# Altium PCB Hat_Board_PCB.PcbDoc (part 2 of 2)
Units mm, origin at the board's own origin, x right, y up, seen from the top; angles counter-clockwise.
Board outline 64 x 85 mm, 4 copper layers (Top Side, Ground Plane, Power Plane, Bottom Side), stack 0.844 mm thick; 133 components, 86 nets, 419 pads, 122 vias.
Unrouted connection lines stored in the file: 4.
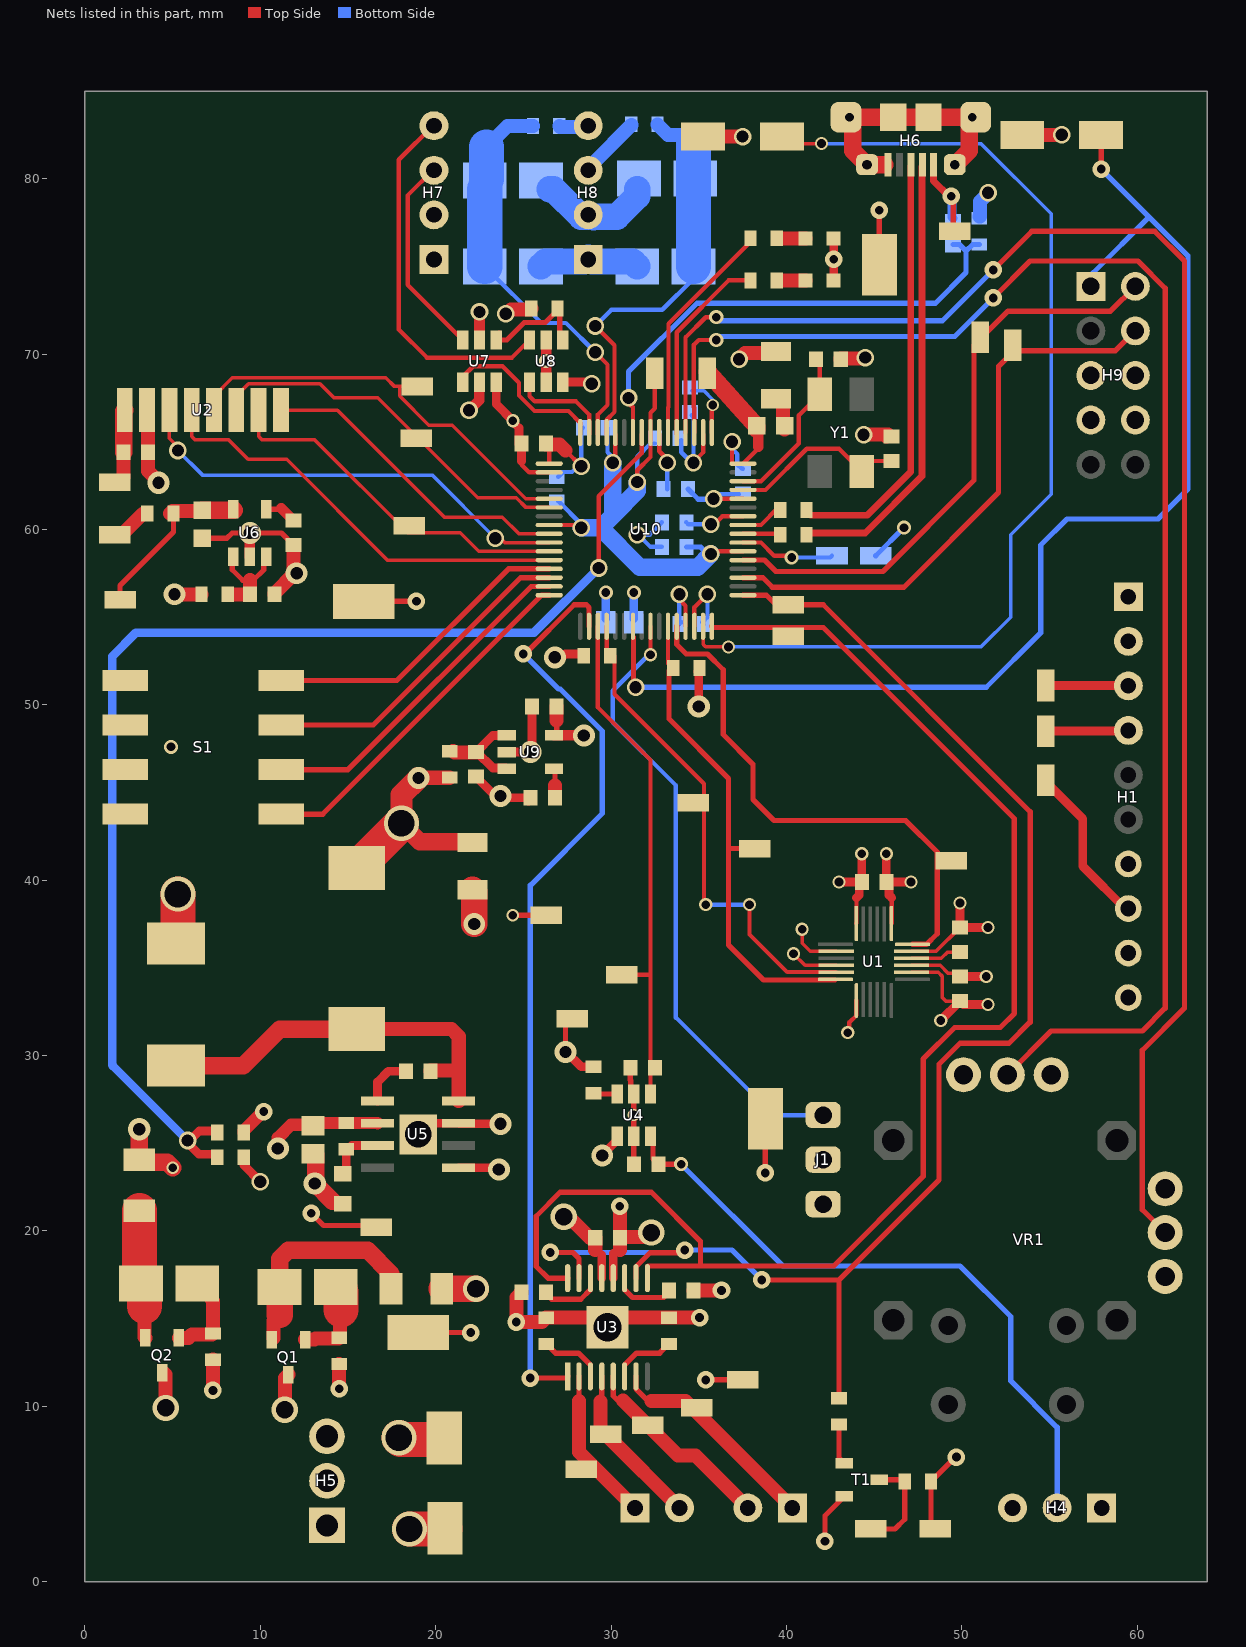
[diagram p4: the nets of this part, all layers, seen from the top]

## Via types
v1: diameter 1, hole 0.7, Top Side to Bottom Side, 32 vias
v2: diameter 1, hole 0.5, Top Side to Bottom Side, 25 vias
v3: diameter 0.75, hole 0.5, Top Side to Bottom Side, 18 vias
v4: diameter 1.25, hole 0.7, Top Side to Bottom Side, 13 vias
v5: diameter 0.8, hole 0.5, Top Side to Bottom Side, 9 vias
v6: diameter 1.5, hole 1, Top Side to Bottom Side, 5 vias
v7: diameter 2, hole 1.5, Top Side to Bottom Side, 5 vias
v8: diameter 0.7, hole 0.5, Top Side to Bottom Side, 4 vias
v9: diameter 2.3, hole 2.1, Top Side to Bottom Side, 4 vias
v10: diameter 1.27, hole 0.7, Top Side to Bottom Side, 3 vias
v11: diameter 1.27, hole 0.711, Top Side to Bottom Side, 2 vias
v12: diameter 2.2, hole 1.6, Top Side to Bottom Side, 1 vias
v13: diameter 1.3, hole 1.1, Top Side to Bottom Side, 1 vias

## Nets (pads, with @x,y where several pads share a name; then routed paths per layer and width w, separated by ;. In a path a pad name is that pad's centre, name@x,y a point inside that pad or via, vN(x,y) a via of type N, cw(c..) or ccw(c..) an arc to the next point about the centre after c; other vN are vias at no path point)
3V3: C1.2 C2.2 C19.2 C22.2 C24.2 C26.2 C27.2 C29.2 C31.2 D4.1 D5.1 DL1.2 DL2.2 H1.1 H1.9 H8.1 H9.7 H9.8 J1.2 R4.2 R6.2 R22.2 R23.2 TP4.1 TP6.1 TP20.1 U1.1 U1.8 U1.13 U1.22 U7.6 U8.6 U9.5 U10.1 U10.7 U10.18 U10.45 U10.58 VR1.1 VR1.4 | length 68.2
  Top Side w0.2: v3(40.4,35.8) 41.065,35.135 U1.22@42.843,35.135 ; U1.8@47.143,34.735 48.665,34.735 48.9,34.5 48.9,33.3 49.1,33.1 C2.2@49.9,33.1
  Top Side w0.25: 24.9,63.9 24.9,63.69 25.34,63.25 U10.18@26.475,63.25 ; U10.7@32.75,65.425 32.75,64.453 33.2,64.003 v1(33.2,63.8) ; v1(33.9,56.3) 33.9,55.997 34.25,55.647 U10.45@34.25,54.475 ; U10.1@35.75,65.525 35.75,67.05 v8(35.8,67.1) ; v1@35.903,60.3 36.353,60.75 U10.58@37.525,60.75 ; v3(43.5,31.3) 43.596,31.396 43.596,31.888 43.993,32.285 U1.1@43.993,33.135 ; U1.13@45.993,37.535 46,37.542 46,39
  Top Side w0.3: U9.5@26.75,48.25 26.9,48.4 26.9,49.1 ; v4(27.4,30.2) 27.4,31.75 27.75,32.1 TP20.1@27.8,32.1 TP20.1@28.1,32.4 ; TP4.1@48.5,3 48.25,3.25 R4.2@48.25,5.7 v2@49.65,7.1
  Top Side w0.5: U7.6@23.45,68.4 23.45,67.15 v3(24.4,66.2) 24.4,66.132 24.75,65.782 24.75,64.85 24.9,64.7 24.9,63.9 ; v11(26.8,52.7) 27.208,52.7 27.408,52.9 28.05,52.9 ; U8.6@27.25,68.4 28.5,68.4 28.504,68.396 28.669,68.396 28.75,68.315 v1@28.75,68.15 ; v4(27.4,30.2) 27.45,30.2 28.3,29.35 R6.2@29,29.35 ; R23.2@34.95,51.9 35,51.95 v11(35,49.9) ; DL1.2@42.7,74.2 42.7,75.5 DL2.2@42.7,76.6 ; v3(45.7,41.5) C1.2@45.7,39.9 ; 46,39 45.85,39.15 45.85,39.75 C1.2@45.7,39.9 ; v3(47.1,39.9) C1.2@45.7,39.9 ; v3(48.8,32) C2.2@49.9,33.1 50.1,32.9 v3(51.5,32.9)
  Top Side w0.6: U9.5@26.75,48.25 v4(28.45,48.25)
  Top Side w0.8: 26.9,49.1 C19.2@26.9,49.9
  Bottom Side w0.2: C31.2@34.6,67.9 35.3,67.9 35.8,67.4 v8(35.8,67.1)
  Bottom Side w0.25: C22.2@33.2,62.3 v1(33.2,63.8) ; C27.2@33.9,54.6 34,54.7 33.9,54.8 v1(33.9,56.3) ; C29.2@34.3,60.4 34.4,60.3 v1(35.7,60.3)
  Bottom Side w0.3: TP6.1@45.1,58.5 v5(46.7,60.1)
  Bottom Side w0.5: C26.2@31.3,54.9 v5(31.3,56.4)
  Bottom Side w1.5: D4.1@26,75 26.275,75.275 28.475,75.275 28.7,75.5 28.925,75.275 31.225,75.275 D5.1@31.5,75
  other v1: 28.9,68.3
  other v2: 49.7,7.1 42.7,75.4
"3V3 Breakout 1": D4.2 D6.1 R19.1 U10.14 | length 22.9
  Top Side w0.25: v1(29.1,70.1) 29.8,69.4 29.8,67.1 29.25,66.55 U10.14@29.25,65.525 U10.14@29.25,65.425
  Bottom Side w0.25: D4.2@22.8,75 26.028,71.772 27.428,71.772 v1(29.1,70.1)
  Bottom Side w0.8: 22.9,81.8 24.1,83 R19.1@25.55,83
  Bottom Side w2: D4.2@22.8,75 22.8,75.2 D6.1@22.8,79.4 ; D6.1@22.9,79.975 22.9,81.8
"3V3 Breakout 2": D5.2 D7.1 R18.1 U10.13 | length 22.3
  Top Side w0.25: v1(29.1,71.6) 30.2,70.5 30.2,66.7 29.75,66.25 U10.13@29.75,65.525 U10.13@29.75,65.425
  Bottom Side w0.25: v1(29.1,71.6) 30.021,72.521 32.921,72.521 D5.2@34.7,74.3
  Bottom Side w0.8: R18.1@32.65,83.1 33.25,82.5 34.2,82.5
  Bottom Side w2: D5.2@34.7,75 34.7,82
"3V3 Radio": C16.2 R1.1 TP16.1 U6.5 | length 10
  Top Side w0.3: TP16.1@2,56 2,56.8 5.05,59.85 R1.1@5.05,60.9
  Top Side w0.8: R1.1@4.85,60.9 4.9,60.95 5,61.05 6.65,61.05 C16.2@6.7,61.1
  Top Side w1: C16.2@6.7,61.1 8.5,61.1 U6.5@8.45,61.15
5V: C12.2 H4.1 H7.1 L2.2 R13.1 R16.2 R17.1 TP18.1 U4.1 U5.5 | length 21.7
  Top Side w0.3: v8(24.4,38) TP18.1@26.3,38
  Top Side w0.5: U5.5@21.311,23.595 23.505,23.595 v4(23.6,23.5) ; v4(29.5,24.3) 29.5,24.325 30.35,25.175 U4.1@30.35,25.4
  Top Side w0.8: v4(5.1,56.3) R13.1@6.65,56.3 ; v4(19.025,45.825) 19.038,45.838 20.787,45.838 R17.1@20.8,45.85 ; v1(24,72.3) 24.054,72.3 24.304,72.55 25.4,72.55 R16.2@25.45,72.6
  Top Side w1: v7(18.044,43.244) 19.087,42.2 22.05,42.2 C12.2@22.1,42.15
  Top Side w1.25: v7(18.044,43.244) 18.044,44.844 v4(19.025,45.825)
  Top Side w2: L2.2@15.5,40.7 v7(18.044,43.244)
"5V Breakout 1": U7.4 U10.16 | length 9.7
  Top Side w0.25: U7.4@21.55,68.4 21.55,68.714 22.136,69.3 23.814,69.3 24.75,68.364 24.75,67.634 25.634,66.75 27.575,66.75 28.25,66.075 U10.16@28.25,65.425
"5V Breakout 2": U8.4 U10.15 | length 5.8
  Top Side w0.25: U8.4@25.35,68.4 25.35,67.6 25.65,67.3 28,67.3 28.75,66.55 U10.15@28.75,65.525 U10.15@28.75,65.425
D_N: H6.2 R21.1 | length 25.4
  Top Side w0.381: R21.1@41.35,59.8 44.498,59.8 47.735,63.037 47.735,80.695 H6.2@47.741,80.7
D_P: H6.3 R20.1 | length 24.4
  Top Side w0.381: R20.1@41.2,61 41.4,60.8 44.6,60.8 47.1,63.3 H6.3@47.1,80.7
Freq1: S1.8 U10.29 | length 17.9
  Top Side w0.3: S1.8@11.2,51.38 17.78,51.38 24.15,57.75 U10.29@26.475,57.75
Freq2: S1.7 U10.30 | length 18.8
  Top Side w0.3: S1.7@11.2,48.84 16.44,48.84 24.85,57.25 U10.30@26.475,57.25
Freq3: S1.6 U10.31 | length 19.6
  Top Side w0.3: S1.6@11.2,46.3 15,46.3 25.45,56.75 U10.31@26.475,56.75
Freq4: S1.5 U10.32 | length 20.5
  Top Side w0.3: S1.5@11.19,43.76 13.56,43.76 26.05,56.25 U10.32@26.475,56.25
GND: C1.1 C2.1 C3.1 C5.1 C6.2 C7.1 C8.1 C9.1 C10.1 C12.1 C13.1 C14.1 C15.1 C16.1 C17.1 C18.1 C19.1 C20.1 C21.1 C22.1 C23.2 C24.1 C25.2 C26.1 C27.1 C28.2 C29.1 C30.2 C31.1 C33.1 D2.1 D6.2 D7.2 H1.2 H1.7 H1.10 H4.3 H5.1 H5.3 H6.5 H6.6 H7.2 H8.2 H9.5 H9.6 J1.3 R2.2 R3.2 R7.1 R8.1 R10.1 R14.1 R15.1 R24.1 S1.1 S1.2 S1.3 S1.4 S2.2 S3.2 T1.2 TP8.1 TP9.1 TP10.1 TP11.1 U1.9 U1.11 U1.18 U1.20 U2.2 U3.13 U3.17 U4.2 U4.5 U5.7 U5.EPAD U6.2 U7.2 U7.5 U8.2 U8.5 U9.2 U10.2 U10.17 U10.46 U10.60 VR1.3 VR1.6 | length 165
  Top Side w0.2: v3(40.9,37.2) 40.905,37.195 40.905,36.395 41.365,35.935 U1.20@42.843,35.935 ; U1.9@47.143,35.135 48.765,35.135 49.2,34.7 C2.1@49.9,34.7 ; U1.11@47.143,35.935 48.535,35.935 C3.1@49.9,37.3
  Top Side w0.25: U10.17@26.475,63.75 26.475,64.425 ; 27.4,64.5 v1(28.3,63.6) ; v1(34.7,63.8) 34.7,63.84 35.25,64.39 U10.2@35.25,65.425 ; U10.46@34.75,54.475 34.75,55.55 v1(35.5,56.3) ; v1(35.85,61.75) U10.60@37.525,61.75 ; U1.18@43.993,37.535 44,37.542 44,39
  Top Side w0.3: C16.1@6.7,59.5 8.1,59.5 8.4,59.8 v4(9.4,59.8) 11.2,59.8 C15.1@11.9,59.1 ; TP9.1@15.9,55.9 v2(18.9,55.9) ; TP8.1@19,14.2 v2(22,14.2) ; 29.1,18.9 29.475,18.625 ; C8.1@31.1,29.3 31.1,28.6 31.125,28.575 31.125,27.975 U4.5@31.3,27.8 v8(31.3,26.6) U4.2@31.3,25.4 C9.1@31.3,23.8 ; v2(38.8,23.3) TP11.1@38.8,26.4 ; v2(42.2,2.3) 42.2,3.75 T1.2@43.3,4.85 ; TP10.1@45.3,75.1 v2(45.3,78.2)
  Top Side w0.5: R15.1@9.05,24.2 9.05,23.75 v1(10,22.8) ; v7(19,25.5) 19.635,26.135 U5.7@21.311,26.135 21.346,26.1 v4(23.7,26.1) ; C17.1@22.3,45.9 23.5,44.7 C18.1@25.4,44.7 ; U9.2@24.05,47.3 v4(25.4,47.3) 25.5,47.4 C19.1@25.5,49.9 ; U3.13@29.475,17.3 29.475,18.625 ; v3(43,39.9) C1.1@44.3,39.9 ; 44,39 44.15,39.15 44.15,39.75 C1.1@44.3,39.9 ; v3(44.3,41.5) C1.1@44.3,39.9 ; C2.1@49.9,34.5 v3(51.4,34.5) ; v3(49.9,38.7) C3.1@49.9,37.3 v3(51.5,37.3)
  Top Side w0.6: U6.2@9.4,58.45 v4(9.4,59.8) ; v1(21.9,66.8) 22.475,67.375 22.475,68.375 U7.5@22.5,68.4 ; U7.2@22.5,70.8 v1(22.5,72.4) ; U8.5@26.3,68.4 v5(26.3,69.6) U8.2@26.3,70.8
  Top Side w0.8: U2.2@3.543,66.8 3.593,66.75 3.593,65.107 3.6,65.1 C5.1@3.6,64.4 3.6,63.327 4.2,62.727 v10(4.2,62.664) ; v2(7.3,10.9) R8.1@7.3,12.65 ; C14.1@10.8,56.3 10.8,56.35 11.95,57.5 v4(12.075,57.5) ; v4@11.9,57.75 C15.1@11.9,59.1 ; v2(14.5,11) R7.1@14.5,12.4 ; C6.2@24.9,16.45 C6.2@24.9,16.5 24.6,16.2 v2(24.6,14.8) 26.05,14.8 R2.2@26.3,15.05 29.25,15.05 v12(29.8,14.5) 30.35,15.05 R3.2@33.3,15.05 v2(35.05,15.05) ; C24.1@26.3,64.9 26.3,64.85 27.05,64.85 27.4,64.5 ; v6(27.3,20.8) 27.6,20.8 28.8,19.6 C7.1@29.1,19.6 29.1,18.9 ; S3.2@35.25,82.4 v1(37.5,82.4) ; v1(37.3,69.7) 37.65,70.05 R24.1@39.4,70.05 ; C20.1@43.1,69.7 43.1,69.75 44.396,69.75 44.446,69.8 v1(44.5,69.8) ; v1(44.4,65.4) C21.1@45.7,65.4 ; C21.1@45.7,65.3 45.65,65.35 C21.1@45.7,65.4 ; C21.1@45.8,65.4 C21.1@45.7,65.4 ; S2.2@53.45,82.5 v1(55.7,82.5)
  Top Side w1: C10.1@13.15,24.35 13.15,22.75 v10(13.1,22.7) 14.1,21.7 ; 45.6,80.8 H6.6@44.6,80.8 44.575,80.8 43.775,81.6 43.775,83.325 H6.6@43.6,83.5 H6.6@46.1,83.5 H6.6@48.1,83.5 H6.6@50.6,83.5 50.425,83.325 50.425,81.6 49.625,80.8 H6.6@49.6,80.8
  Top Side w1.5: C12.1@22.1,39.45 22.2,39.35 v4(22.2,37.5)
  Top Side w2: D2.1@4.75,36.375 D2.1@5.2,36.375 5.3,36.475 v7(5.3,39.2) ; v7(18.5,3) 20.522,3 C13.1@20.522,3.039
  Bottom Side w0.25: C28.2@27,63 27.275,63.275 27.772,63.275 28.097,63.6 v1(28.3,63.6) 28.3,65.6 28.25,65.65 C25.2@28.4,65.8 ; v1(31.5,59.7) v1@31.55,59.7 ; C30.2@32.9,59 32.25,59 v1@31.55,59.7 ; C29.1@32.9,60.4 32.2,59.7 v1@31.55,59.7 ; C23.2@34,65.1 34,64.4 v1@34.6,63.8 ; C31.1@34.6,66.5 34.7,66.4 v1(34.7,63.8) ; C27.1@35.3,54.6 35.2,54.7 35.5,55 v1(35.5,56.3) ; v1(35.85,61.75) 36.1,62 C33.1@37.3,62
  Bottom Side w0.3: C22.1@34.4,62.3 34.977,61.723 35.823,61.723 v1(35.85,61.75)
  Bottom Side w0.5: C26.1@29.7,54.9 v5(29.7,56.4)
  Bottom Side w0.8: R14.1@51,77.85 51.05,77.85 51.05,78.696 51.5,79.146 v1(51.5,79.2)
  Bottom Side w1.5: D6.2@26.5,79.4 26.725,79.4 28.296,77.829 28.971,77.829 29,77.8 29.029,77.829 30.329,77.829 31.5,79 D7.2@31.5,79.4
  other v4: 23.7,44.8
  other v5: 4.9,47.6
"IMU I2C CLK": R22.1 TP32.1 U1.23 U10.36 | length 28.1
  Top Side w0.25: U10.36@29.75,54.475 29.75,53 R22.1@29.95,52.8 ; R22.1@30.2,52.8 30.2,50.6 35.3,45.5 35.3,38.7 v3(35.4,38.6) ; v3(37.9,38.6) 37.9,36.9 40.04,34.76 U1.23@42.818,34.76
  Bottom Side w0.25: v3(35.4,38.6) v3(37.9,38.6)
"IMU I2C DATA": R23.1 TP27.1 U1.24 U10.43 | length 27.7
  Top Side w0.25: R23.1@33.25,52.35 U10.43@33.25,54.475
  Top Side w0.3: R23.1@33.45,52.1 33.3,51.95 33.3,49.2 36.7,45.8 36.7,41.8 ; TP27.1@38.1,41.8 36.7,41.8 ; U1.24@42.758,34.3 38.7,34.3 36.7,36.3 36.7,41.8
"IMU INT": TP28.1 U1.12 U10.44 | length 30.4
  Top Side w0.3: U10.44@33.75,54.475 33.75,53.44 34.29,52.9 35.5,52.9 36.4,52 36.4,48.3 38.1,46.6 38.1,44.6 39.3,43.4 46.8,43.4 48.6,41.6 48.6,36.942 47.993,36.335 U1.12@47.193,36.335
IMU/Joystick: J1.1 U10.41 | length 35.7
  Top Side w0.25: v3(32.25,52.85) U10.41@32.25,54.475
  Bottom Side w0.25: v3@32.35,53.05 32.25,52.95 v3(32.25,52.85) 32.154,52.85 30.1,50.796 30.1,49 33.7,45.4 33.7,32.16 39.26,26.6 J1.1@42.1,26.6
"Joystick X axis": U10.4 VR1.5 | length 94.2
  Top Side w0.25: U10.4@34.25,65.525 34.25,70.95 35.4,72.1 v5(36,72.1)
  Top Side w0.3: v2(51.8,74.8) 54,77 61,77 62.7,75.3 62.7,32.7 60.3,30.3 60.3,21.2 VR1.5@61.6,19.9
  Bottom Side w0.3: v5(36,72.1) 36.2,71.9 48.9,71.9 v2(51.8,74.8)
"Joystick Y axis": U10.3 VR1.2 | length 86.1
  Top Side w0.25: U10.3@34.75,65.525 34.75,66.95 34.725,66.975 34.725,70.525 35,70.8 v5(36,70.8)
  Top Side w0.3: v2(51.8,73.2) 53.9,75.3 60.051,75.3 61.6,73.751 61.6,32.7 60.3,31.4 55.1,31.4 VR1.2@52.6,28.9
  Bottom Side w0.3: v5(36,70.8) 36.2,71 49.6,71 v2(51.8,73.2)
"LED Signal": C8.2 TP24.1 U4.4 U10.35 | length 29.6
  Top Side w0.25: U10.35@29.25,54.475 29.25,49.85 32.25,46.85 32.25,34.6 ; TP24.1@30.6,34.6 32.25,34.6 ; U4.4@32.25,27.8 32.25,34.6
NetC3_2: C3.2 U1.10 | length 2.9
  Top Side w0.2: U1.10@47.143,35.535 48.835,35.535 49.2,35.9 C3.2@49.9,35.9
NetC4_1: C4.1 U3.11 | length 3.5
  Top Side w0.3: U3.11@30.775,17.3 30.775,16.65 31.225,16.2 33,16.2 C4.1@33.3,16.5
NetC5_2: C5.2 L1.1 U2.1 | length 4
  Top Side w0.8: L1.1@2.1,62.9 2.2,63 C5.2@2.2,64.4
  Top Side w1: C5.2@2.2,64.4 2.221,64.421 2.221,66.75 U2.1@2.271,66.8
NetC6_1: C6.1 U3.14 | length 3.1
  Top Side w0.3: C6.1@26.6,16.1 28.275,16.1 28.825,16.65 U3.14@28.825,17.3
NetC9_2: C9.2 H4.2 U4.3 | length 37.5
  Top Side w0.3: U4.3@32.25,25.4 32.4,25.25 32.4,24.1 C9.2@32.7,23.8 v5(34,23.8)
  Bottom Side w0.3: v5(34,23.8) 39.8,18 49.9,18 52.8,15.1 52.8,11.432 55.44,8.792 H4.2@55.44,4.2
NetC11_1: C11.1 U5.1 | length 2.9
  Top Side w0.5: U5.1@16.689,27.405 16.689,28.489 17.3,29.1 C11.1@18.3,29.1
NetC11_2: C11.2 D2.2 L2.1 U5.8 | length 22.5
  Top Side w0.8: L2.1@15.5,31.5 20.9,31.5 21.316,31.084 21.316,29.242 ; C11.2@19.7,29.1 19.7,29.15 21.225,29.15 21.316,29.242 ; U5.8@21.311,27.405 21.316,27.4 21.316,29.242
  Top Side w1: D2.2@5.2,29.425 9.025,29.425 11.1,31.5 L2.1@15.5,31.5
NetC13_2: C13.2 H5.2 Q1.3 Q2.3 | length 6.8
  Top Side w0.8: Q2.3@4.5,11.9 4.6,11.8 v6(4.6,9.9) ; v6(11.4,9.8) 11.4,11.6 Q1.3@11.6,11.8
  Top Side w2: v7(17.9,8.2) 18,8.1 20.489,8.1 C13.2@20.489,8.184
NetC14_2: C14.2 R13.2 U6.1 U6.3 | length 5.8
  Top Side w0.3: U6.1@8.45,58.45 8.4,58.4 8.4,57.7 9,57.1 9.4,57.1 9.6,57.1 10.2,57.7 10.2,58.3 U6.3@10.35,58.45
  Top Side w0.8: R13.2@8.3,56.3 C14.2@9.4,56.3 9.4,57.1
NetC15_2: C15.2 U6.4 | length 2.1
  Top Side w0.3: U6.4@10.35,61.15 11.25,61.15 11.35,61.15 11.4,61.2
  Top Side w0.6: 11.2,61.2 11.25,61.15 C15.2@11.9,60.5
NetC17_2: C17.2 R17.2 U9.1 U9.3 | length 5.6
  Top Side w0.5: C17.2@22.3,47.3 C17.2@22.312,47.3 ; U9.3@24.05,46.35 24,46.4 23.25,46.4 22.35,47.3 C17.2@22.312,47.3 ; U9.1@24.05,48.25 23.25,48.25 C17.2@22.312,47.3
  Top Side w0.8: R17.2@21,47.35 21.063,47.288 C17.2@22.3,47.288
NetC18_2: C18.2 U9.4 | length 1.5
  Top Side w0.3: U9.4@26.75,46.35 26.8,46.3 26.8,45.6
  Top Side w0.8: C18.2@26.8,44.7 26.8,45.4
NetC20_2: C20.2 U10.62 Y1.3 | length 9.2
  Top Side w0.25: 38.552,62.752 40.7,64.9 40.7,66.5 Y1.3@41.9,67.7 41.9,69.3 C20.2@41.7,69.5
  Top Side w0.254: U10.62@37.525,62.75 37.527,62.752 38.552,62.752
NetC21_2: C21.2 U10.61 Y1.1 | length 9.9
  Top Side w0.25: U10.61@37.525,62.25 38.811,62.25 41.161,64.6 43,64.6 Y1.1@44.3,63.3 44.9,63.9 C21.2@45.7,63.9
NetC23_1: C23.1 C25.1 C28.1 C30.1 L3.2 U10.8 U10.12 U10.24 U10.54 | length 35.2
  Top Side w0.25: U10.24@26.475,60.25 v1@28.15,60.25 ; v1(30.1,63.8) 30.25,63.95 U10.12@30.25,65.425 ; v1(31.5,62.7) 31.5,63.38 32.25,64.13 U10.8@32.25,65.525 32.25,66.65 32.5,66.9 L3.2@32.5,68.7 ; v1(35.7,58.6) 35.85,58.75 U10.54@37.525,58.75
  Bottom Side w0.25: C28.1@27,61.6 28.3,60.3 v1(28.3,60.1) ; C25.1@29.8,65.8 29.8,64.4 30.1,64.1 v1(30.1,63.8) ; v1(31.5,62.7) 31.5,64.15 32.25,64.9 C23.1@32.5,64.9
  Bottom Side w0.3: C30.1@34.3,59 35.111,59 35.511,58.6 v1(35.7,58.6)
  Bottom Side w1: v1(28.3,60.1) 29.4,60.1 ; v1(30.1,63.8) 30.1,61 30.2,60.9 ; v1(31.5,62.7) 31.5,62.2 30.2,60.9 ; v1(35.7,58.6) 34.95,57.85 31.65,57.85 29.4,60.1 ; 29.4,60.1 30.2,60.9
NetC32_1: C32.1 R24.2 | length 2
  Top Side w0.8: R24.2@39.4,67.35 39.65,67.35 39.8,67.2 39.8,65.8 C32.1@39.9,65.7
NetC32_2: C32.2 C33.2 L3.1 U10.64 | length 9.5
  Top Side w0.254: v1(36.9,65) 36.9,63.803 U10.64@36.951,63.752 ; U10.64@37.525,63.75 38.437,64.662
  Top Side w0.6: 38.4,64.7 38.4,65.4
  Top Side w1: L3.1@35.5,69 35.55,68.945 38.309,65.864 C32.2@38.3,65.7
  Bottom Side w0.254: v1(36.9,65) 36.9,64.598 37.202,64.296 37.202,63.723 37.475,63.45 C33.2@37.525,63.45
NetD1_1: D1.1 F1.1 Q1.2 | length 12.6
  Top Side w0.8: Q1.2@10.75,13.9 10.75,14.85 11.1,15.2
  Top Side w1: D1.1@11.1,16.8 11.1,18.4 11.58,18.88 16.12,18.88 17.45,17.55 F1.1@17.45,16.7
  Top Side w1.5: 11.1,15.2 D1.1@11.1,16.8
NetD1_2: D1.2 Q1.1 R7.2 | length 4.4
  Top Side w0.8: Q1.1@12.55,13.8 13.1,13.8 13.15,13.85 14.45,13.85 R7.2@14.5,13.9 14.55,13.95 14.55,14.75
  Top Side w2: D1.2@14.3,16.8 14.525,16.8 14.55,16.775 14.55,16.55 14.6,16.5 14.6,15.5
NetD3_1: D3.1 F2.1 Q2.2 | length 6.7
  Top Side w0.8: 3.4,14.9 3.4,13.95 Q2.2@3.45,13.9
  Top Side w2: F2.1@3.1,21.15 3.1,16.925 3.125,16.9 3.2,16.9 3.375,16.9 3.4,16.875 3.4,15.7
NetD3_2: D3.2 Q2.1 R8.2 | length 5.3
  Top Side w0.8: Q2.1@5.35,13.9 5.9,13.9 6.1,14.1 7.25,14.1 R8.2@7.3,14.15 7.3,16 7.25,16.05 7.25,16.275 6.625,16.9 D3.2@6.4,16.9
NetDL1_1: DL1.1 R25.1 | length 1.5
  Top Side w0.8: R25.1@39.65,74.2 DL1.1@41.1,74.2
NetDL2_1: DL2.1 R26.1 | length 1.5
  Top Side w0.8: R26.1@39.65,76.6 DL2.1@41.1,76.6
NetH1_3: H1.3 TP3.1 | length 4.7
  Top Side w0.5: TP3.1@54.8,51.1 59.48,51.1 H1.3@59.5,51.08
NetH1_4: H1.4 TP2.1 | length 4.7
  Top Side w0.5: TP2.1@54.8,48.5 59.46,48.5 H1.4@59.5,48.54
NetH1_8: H1.8 TP1.1 | length 9.5
  Top Side w0.5: TP1.1@54.7,45.7 56.9,43.5 56.9,40.8 59.4,38.3 59.42,38.3 H1.8@59.5,38.38
NetH7_3: H7.3 U7.3 | length 11.7
  Top Side w0.25: H7.3@19.9,80.54 18.4,79.04 18.4,73.95 U7.3@21.55,70.8
NetH7_4: H7.4 U8.3 | length 21
  Top Side w0.25: H7.4@19.9,83.08 17.9,81.08 17.9,71.4 19.5,69.8 24.35,69.8 U8.3@25.35,70.8
NetH8_3: H8.3 R18.2 | length 3.6
  Bottom Side w0.8: H8.3@29,80.34 29,80.9 R18.2@31.175,83.075
NetH8_4: H8.4 R19.2 | length 2
  Bottom Side w0.8: R19.2@27.05,83 27.1,82.95 28.93,82.95 H8.4@29,82.88
NetL1_2: L1.2 R1.2 | length 2.3
  Top Side w0.8: L1.2@1.8,59.8 L1.2@1.7,59.7 2.1,59.7 3.25,60.85 3.3,60.85 R1.2@3.35,60.9
NetR2_1: R2.1 U3.3 | length 3.7
  Top Side w0.3: R2.1@26.3,13.55 26.827,13.023 28.152,13.023 28.825,12.35 U3.3@28.825,11.7
NetR3_1: R3.1 U3.6 | length 3.7
  Top Side w0.3: U3.6@30.775,11.7 30.775,12.35 31.448,13.023 32.773,13.023 R3.1@33.3,13.55
NetR4_1: R4.1 T1.3 TP5.1 | length 5.8
  Top Side w0.3: TP5.1@44.8,3 46.2,3 46.75,3.55 R4.1@46.75,5.7 46.65,5.8 T1.3@45.3,5.8
NetR5_2: R5.2 T1.1 | length 2.3
  Top Side w0.3: R5.2@43,8.95 43,7.05 T1.1@43.3,6.75
NetR6_1: R6.1 U4.6 | length 1.4
  Top Side w0.3: R6.1@29,27.85 29.05,27.8 U4.6@30.35,27.8
NetR9_1: R9.1 R10.2 U5.3 | length 3.1
  Top Side w0.5: R10.2@14.9,23.45 R9.1@14.9,24.65 15,24.65 15.211,24.861 16.685,24.861 U5.3@16.689,24.865
NetR16_1: R16.1 U7.1 U8.1 | length 6.8
  Top Side w0.3: U7.1@23.625,71.2 23.45,71.025 U7.1@23.45,70.8 24.051,70.8 25.051,71.8 26.25,71.8 26.85,72.4 26.95,72.4 R16.1@26.95,72.6 27.075,72.475 27.075,70.975 U8.1@27.25,70.8
NetR20_2: R20.2 U10.57 | length 2.5
  Top Side w0.25: U10.57@37.525,60.25 38.55,60.25 39.5,61.2 R20.2@39.65,61.2
NetR21_2: R21.2 U10.56 | length 1.8
  Top Side w0.25: U10.56@37.525,59.75 R21.2@39.3,59.75
NetTP7_1: TP7.1 U10.55 | length 5.5
  Top Side w0.25: U10.55@37.525,59.25 38.55,59.25 39.3,58.5 40.2,58.5 v5(40.3,58.4)
  Bottom Side w0.25: v5(40.3,58.4) 42.5,58.4 TP7.1@42.6,58.5
nRST: H9.1 S2.1 U10.39 | length 69
  Top Side w0.3: U10.39@31.275,53.85 31.275,51.125 v1(31.4,51) ; v2(57.95,80.55) S2.1@57.95,82.5 S2.1@58.1,82.65
  Bottom Side w0.3: v1(31.4,51) 51.4,51 54.5,54.1 54.5,59.1 56,60.6 61.2,60.6 62.9,62.3 62.9,75.6 60.68,77.82 ; H9.1@57.5,74.64 60.68,77.82 ; v2(57.95,80.55) 60.68,77.82
"Piezo 11": H2.1 TP15.1 U3.2 | length 8.8
  Top Side w0.3: 28.175,10.3 U3.2@28.175,11.7
  Top Side w0.8: 28.175,10.3 28.175,7.385 H2.1@31.36,4.2
"Piezo 12": H2.2 TP14.1 U3.4 | length 9.3
  Top Side w0.3: 29.288,10.388 29.475,10.575 U3.4@29.475,11.7
  Top Side w0.8: 29.4,10.275 29.4,8.7 29.9,8.2 H2.2@33.9,4.2
"Piezo 21": H3.1 TP13.1 U3.7 | length 12.2
  Top Side w0.3: U3.7@31.425,11.7 31.425,10.975 32.1,10.3
  Top Side w0.8: 32.3,10.3 34.24,10.3 H3.1@40.34,4.2
"Piezo 22": H3.2 TP12.1 U3.5 | length 11.3
  Top Side w0.3: U3.5@30.125,11.7 30.125,10.575 30.5,10.2
  Top Side w0.8: 30.675,10.325 33.819,7.181 34.819,7.181 H3.2@37.8,4.2
"Piezo High": TP29.1 U3.9 U3.16 U10.48 | length 81.8
  Top Side w0.3: U3.16@27.525,17.3 26.4,17.3 25.734,17.966 25.734,20.834 27.1,22.2 32.3,22.2 35.1,19.4 35.1,18 ; U3.9@32.075,17.3 32.075,17.964 32.111,18 35.1,18 ; U10.48@35.75,54.475 35.825,54.4 42.1,54.4 53,43.5 53,32.4 52.2,31.6 49.6,31.6 47.8,29.8 47.8,23.1 42.7,18 36.9,18 35.1,18
"Piezo Low": R5.1 TP22.1 U3.10 U3.15 U10.49 | length 84.6
  Top Side w0.3: v2(26.534,18.766) 27.834,18.766 28.175,18.425 U3.15@28.175,17.3 ; U3.10@31.425,17.3 31.425,17.95 32.225,18.75 34.05,18.75 v2(34.2,18.9) ; U10.49@37.525,56.25 38.85,56.25 39.4,55.7 TP22.1@39.7,55.7 ; v2(38.6,17.2) 43,17.2 ; TP22.1@40.1,55.7 42.1,55.7 53.9,43.9 53.9,31.9 52.7,30.7 49.9,30.7 48.7,29.5 48.7,22.9 43,17.2 ; R5.1@43,10.45 43,17.2
  Bottom Side w0.3: v2(26.534,18.766) 34.066,18.766 v2(34.2,18.9) 36.9,18.9 v2(38.6,17.2)
"Piezo Sleep": U3.1 U10.34 | length 53
  Top Side w0.3: v2@25.1,52.9 27.9,55.7 28.6,55.7 28.75,55.55 U10.34@28.75,54.475 ; v2(25.4,11.6) 27.425,11.6 U3.1@27.525,11.7
  Bottom Side w0.3: v2(25,52.9) 27,50.9 27.108,50.9 29.5,48.508 29.5,43.8 25.4,39.7 v2(25.4,11.6)
"Radio CE": U2.3 U10.26 | length 25.9
  Top Side w0.2: U2.3@4.814,66.8 4.814,65.202 5.3,64.716 v1(5.3,64.5) ; v1(23.4,59.5) 23.679,59.5 23.929,59.25 U10.26@26.475,59.25
  Bottom Side w0.2: v1(5.3,64.5) 6.7,63.1 19.8,63.1 v1(23.4,59.5)
"Radio CSN": U2.4 U10.28 | length 24.8
  Top Side w0.2: U2.4@6.086,66.8 6.086,65.3 6.286,65.1 8.2,65.1 9.3,64 11.5,64 17.25,58.25 U10.28@26.475,58.25
"Radio IRQ": U2.8 U10.25 | length 18.2
  Top Side w0.2: U2.8@11.171,66.8 14.4,66.8 20.5,60.7 23.8,60.7 24.75,59.75 U10.25@26.475,59.75
"Radio MISO": TP25.1 U2.7 U10.27 | length 20.8
  Top Side w0.2: U2.7@9.9,66.8 9.9,65.3 10.1,65.1 13.1,65.1 18.4,59.8 21.4,59.8 22.45,58.75 U10.27@26.475,58.75
"Radio MOSI": TP26.1 U2.6 U10.22 | length 21.1
  Top Side w0.2: U2.6@8.629,67.6 9.329,68.3 13.4,68.3 14.2,67.5 16.7,67.5 19,65.2 22.4,61.8 24.6,61.8 25.15,61.25 U10.22@26.475,61.25
"Radio SCK": TP31.1 U2.5 U10.21 | length 24.5
  Top Side w0.2: U2.5@7.357,66.8 7.357,67.6 8.407,68.65 17.15,68.65 17.65,68.15 17.95,68.15 ; TP31.1@18.95,68.15 17.95,68.15 ; U10.21@26.475,61.75 25.145,61.75 20.945,65.95 19.609,65.95 17.95,67.609 17.95,68.15
Sleep: S3.1 U10.47 | length 60.5
  Top Side w0.2: U10.47@35.25,54.475 35.25,53.44 35.39,53.3 v3(36.7,53.3) ; S3.1@39.75,82.4 40.15,82 v3(42,82)
  Bottom Side w0.2: v3(36.7,53.3) 51.1,53.3 52.8,55 52.8,59.7 55.1,62 55.1,78 51.1,82 v3(42,82)
STATUS0: R25.2 U10.5 | length 11.4
  Top Side w0.25: U10.5@33.75,65.425 U10.5@33.75,65.525 33.75,71.25 36.7,74.2 R25.2@38.15,74.2
STATUS1: R26.2 U10.6 | length 13.2
  Top Side w0.25: U10.6@33.25,65.425 U10.6@33.25,65.525 33.25,66.95 33.275,66.975 33.275,71.725 R26.2@38.15,76.6
SWCLK: H9.2 TP30.1 U10.53 | length 33.9
  Top Side w0.3: U10.53@37.525,58.25 38.75,58.25 39.4,57.6 45.5,57.6 50.7,62.8 50.7,70.5 52.645,72.445 58.485,72.445 H9.2@59.9,73.86
SWDIO: H9.4 TP23.1 U10.51 | length 32.9
  Top Side w0.3: U10.51@37.525,57.25 38.65,57.25 39.2,56.7 46.7,56.7 52.1,62.1 52.1,69.3 52.995,70.195 58.775,70.195 H9.4@59.9,71.32
USB_Detect: R11.1 R14.2 U10.10 | length 28.3
  Top Side w0.25: v1@31.166,67.066 31.25,66.982 U10.10@31.25,65.525 U10.10@31.25,65.425
  Top Side w0.3: v1(31,67.5) 31,67.232 v1@31.166,67.066
  Bottom Side w0.3: v1(31,67.5) 31,69 34.9,72.9 48.5,72.9 50.25,74.65 50.25,75.875 ; R11.1@49.5,76.25 49.875,76.25 50.25,75.875 ; R14.2@51,76.25 50.625,76.25 50.25,75.875
VBATT: C10.2 F2.2 R9.2 R12.2 TP21.1 U5.2 | length 16.7
  Top Side w0.3: v2(12.9,21) 13.6,20.3 TP21.1@17.1,20.3
  Top Side w0.7: R12.2@9.05,25.6 9.05,25.7 10.15,26.8 v2(10.2,26.8) ; v4(11,24.7) 11,25.3 11.75,26.05 13.15,26.05 13.2,26 13.35,26.15 R9.2@14.9,26.15 16.674,26.15 U5.2@16.689,26.135
  Top Side w1: v10(3.1,25.8) F2.2@3.1,24.05 3.25,23.9 4.7,23.9 v8(5,23.6)
"VBATT Detection": R12.1 R15.2 U10.9 | length 72
  Top Side w0.25: v1(29.3,57.8) 29.3,61.9 31.75,64.35 U10.9@31.75,65.425
  Top Side w0.5: R15.2@7.55,24.2 7.55,24.265 7.45,24.365 6.5,24.365 5.85,25.015 v1(5.85,25.15) 5.985,25.15 6.535,25.7 7.45,25.7 R12.1@7.55,25.6
  Bottom Side w0.5: v1(5.85,25.15) 1.6,29.4 1.55,29.45 1.55,52.75 2.9,54.1 25.6,54.1 v1(29.3,57.8)
VBUS: H6.1 R11.2 TP19.1 | length 5.5
  Top Side w0.3: v2@49.275,79 49.523,78.752 TP19.1@49.523,77.077
  Top Side w0.4: H6.1@48.4,80.8 48.4,79.875 v2@49.275,79
  Bottom Side w0.5: v2@49.45,79 49.45,77.8 R11.2@49.5,77.75
  other v2: 49.4,79
VPIEZO: C4.2 C7.2 F1.2 TP17.1 U3.12 | length 11.7
  Top Side w0.3: 30.125,18.725 30.3,18.9 ; v2(35.4,11.5) TP17.1@37.5,11.5
  Top Side w0.5: U3.12@30.125,17.3 30.125,18.725
  Top Side w0.8: 30.5,18.9 v2(30.5,21.4) ; C7.2@30.5,19.65 31.861,19.65 32.111,19.9 v6(32.3,19.9) ; C4.2@34.7,16.6 v2(36.3,16.6)
  Top Side w1.5: F1.2@20.35,16.7 v6(22.3,16.7)
pads on no net: H1.5 H1.6 H6.4 H9.3 H9.9 H9.10 U1.2 U1.3 U1.4 U1.5 U1.6 U1.7 U1.14 U1.15 U1.16 U1.17 U1.19 U1.21 U3.8 U5.4 U5.6 U10.11 U10.19 U10.20 U10.23 U10.33 U10.37 U10.38 U10.40 U10.42 U10.50 U10.52 U10.59 U10.63 VR1.7 VR1.8 VR1.9 VR1.10 VR1.11 VR1.12 VR1.13 VR1.14 Y1.2 Y1.4
copper on no net: | length 1.7
  Bottom Side w0.254: 12.4,46.8 14.1,46.8
  other v9: 27,2 62,2 15,83 62,83
  other v13: 44.993,35.335

## Polygon pours and split planes (outlines as drawn)
GND on Top Side "Top Side-GND" (solid, remove dead copper, pour order 10): 0,85 0,0 64,0 64,85
GND on Bottom Side "Bottom Side-GND" (solid, remove dead copper, pour order 12): 0,85 0,0 64,0 64,85
GND on Ground Plane (split plane): 63.49,0.51 0.51,0.51 0.51,68.9 17.6,68.9 17.6,84.49 63.49,84.49
NetC13_2 on Power Plane (split plane): 10.158,20.208 10.2,20.18 10.25,20.171 18.771,20.171 18.771,11.9 18.78,11.85 18.808,11.808 21.471,9.146 21.471,0.51 0.51,0.51 0.51,22.371 7.996,22.371
VBATT on Power Plane (split plane): 18.771,27.446 18.771,22.2 18.771,20.429 10.304,20.429 8.351,22.382 8.392,22.408 8.42,22.45 8.429,22.5 8.42,22.55 8.392,22.592 8.35,22.62 8.3,22.629 0.51,22.629 0.51,27.427 0.754,27.671 11.1,27.671 11.15,27.68 11.192,27.708 12.454,28.971 17.246,28.971
5V on Power Plane (split plane): 24.771,71.254 23.308,69.792 23.28,69.75 23.271,69.7 23.271,52.4 23.28,52.35 23.308,52.308 25.371,50.246 25.371,43.4 25.371,32.3 25.371,29.2 25.38,29.15 25.408,29.108 28.008,26.508 28.05,26.48 28.1,26.471 33.646,26.471 41.408,18.708 46.171,13.946 46.171,8.9 46.18,8.85 46.208,8.808 49.508,5.508 49.55,5.48 49.6,5.471 63.49,5.471 63.49,0.51 42.029,0.51 42.029,1.1 42.029,6 42.02,6.05 41.992,6.092 37.429,10.654 37.429,18 37.42,18.05 37.392,18.092 33.192,22.292 33.15,22.32 33.1,22.329 19.029,22.329 19.029,27.5 19.02,27.55 18.992,27.592 17.392,29.192 17.35,29.22 17.3,29.229 12.4,29.229 12.35,29.22 12.308,29.192 11.046,27.929 0.7,27.929 0.65,27.92 0.608,27.892 0.51,27.794 0.51,57.671 2.7,57.671 2.75,57.68 2.792,57.708 2.883,57.8 14.6,57.8 17.6,60.8 17.6,69 17.6,84.49 24.771,84.49
VPIEZO on Power Plane (split plane): 37.171,17.946 37.171,10.6 37.18,10.55 37.208,10.508 41.771,5.946 41.771,1.1 41.771,0.51 21.729,0.51 21.729,9.2 21.72,9.25 21.692,9.292 19.029,11.954 19.029,22.071 33.046,22.071
3V3 on Power Plane (split plane): 63.49,5.729 49.654,5.729 46.429,8.954 46.429,14 46.42,14.05 46.392,14.092 41.592,18.892 33.792,26.692 33.75,26.72 33.7,26.729 28.154,26.729 25.629,29.254 25.629,32.3 25.629,43.4 25.629,50.3 25.62,50.35 25.592,50.392 23.529,52.454 23.529,69.646 24.992,71.108 25.02,71.15 25.029,71.2 25.029,84.49 63.49,84.49

## Other copper
Top Side:
  pour cut-out: 12.9,85 12.9,68.9 17.7,68.9 17.7,85
  pour cut-out: 0,85 0,83.9 12.9,83.9 12.9,85
Bottom Side:
  pour cut-out: 18.6,87
  pour cut-out: 0,85 0,65.3 18.5,65.3 18.5,85
Ground Plane (plane layer: these items are gaps in the copper):
  pour cut-out: 0.2,84.9 0.2,68.9 17.6,68.9 17.6,84.9
Power Plane (plane layer: these items are gaps in the copper):
  pour cut-out: 0.2,84.5 0.2,69 17.6,69 17.6,84.5
  pour cut-out: 0.5,69.4 0.5,57.8 2.7,57.8 14.6,57.8 17.6,60.8 17.6,69.4
  lines w0.254: -0.4,84.9 63.6,84.9 ; -0.1,22.5 7.8,22.5 8.3,22.5 ; 0,0 64,0 64,85 ; 0.2,27.3 0.7,27.8 11.1,27.8 12.4,29.1 17.3,29.1 18.9,27.5 18.9,20.3 ; 0.2,57.8 2.7,57.8 4.6,59.7 12.4,59.7 16.3,63.6 ; 8.05,22.5 10.25,20.3 10.5,20.3 18.9,20.3 ; 15.4,20.3 18.9,20.3 ; 21.6,0 21.6,9.2 18.9,11.9 18.9,22.2 33.1,22.2 37.3,18 37.3,10.6 41.9,6 41.9,1.1 41.9,-0.6 ; 24.9,84.9 24.9,71.2 23.4,69.7 23.4,52.4 25.5,50.3 25.5,43.4 25.5,32.3 25.5,29.2 28.1,26.6 33.7,26.6 41.5,18.8 46.3,14 46.3,8.9 49.6,5.6 54.7,5.6 63.6,5.6 64,5.2

## Silkscreen, mask and mechanical layers (free items; w line width, h text height)
Bottom Overlay:
  text "Group 17 / Hat Board / A.F  H.P" at 55.1,45.2 h1.52
Board Outline:
  the board outline again, w0.254

## Text inside footprints (layer, text, board x,y; h text height)
H1: Top Overlay "1" at 53.9,57.5 h0.8 r270
H2: Top Overlay "1" at 29.2,1.1 h0.8
H3: Top Overlay "1" at 40.8,7.8 h0.8
H4: Top Overlay "1" at 59.94,5.7 h0.8
H6: Mechanical 1 "PCB Edge" at 49.25,85.77 h0.52 r180
H7: Top Overlay "1" at 24.345,76.035 h0.8 r180
H8: Top Overlay "1" at 33.145,76.035 h0.8 r180
H9: Top Overlay "9" at 56.61,62.5 h1.5 r270; Top Overlay "10" at 59.15,62.5 h1.5 r270; Top Overlay "1" at 56.61,75.56 h1.5 r270; Top Overlay "2" at 59.15,76.06 h1.5 r270
S1: Top Overlay "4" at 1.625,45.305 h0.8 r270; Top Overlay "3" at 1.6,47.78 h0.8 r270; Top Overlay "2" at 1.65,50.38 h0.8 r270; Top Overlay "1" at 1.55,52.98 h0.8 r270; Top Overlay "ON" at 10.428,54.428 h1 r270
U2: Top Overlay "NO GND/ / POWER / PLANES / UNDER / OR NEARBY" at 1.8,76.8 h0.8
U5: Mechanical 13 "*" at 17.07,26.656 h1.27